# Altium PCB MIOS-Emphase.PcbDoc
Units mm, origin at the board's own origin, x right, y up, seen from the top; angles counter-clockwise.
Board outline 30 x 25 mm, 2 copper layers (Top Layer, Bottom Layer); 2 components, 7 nets, 22 pads, 0 vias.
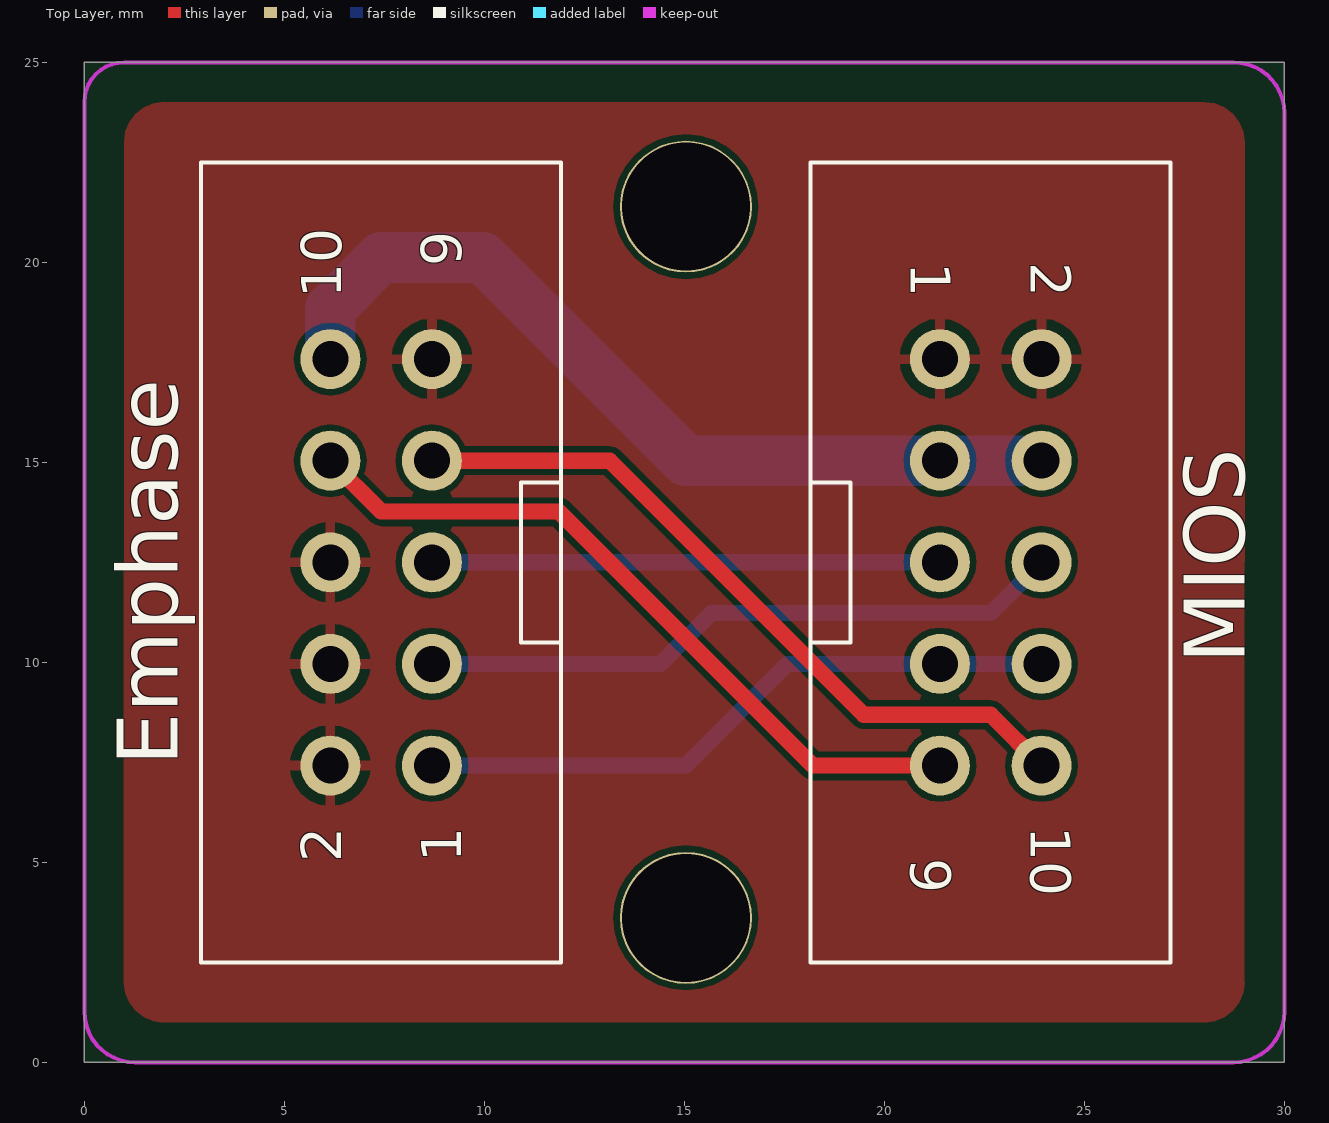
[diagram p0: Top Layer view]
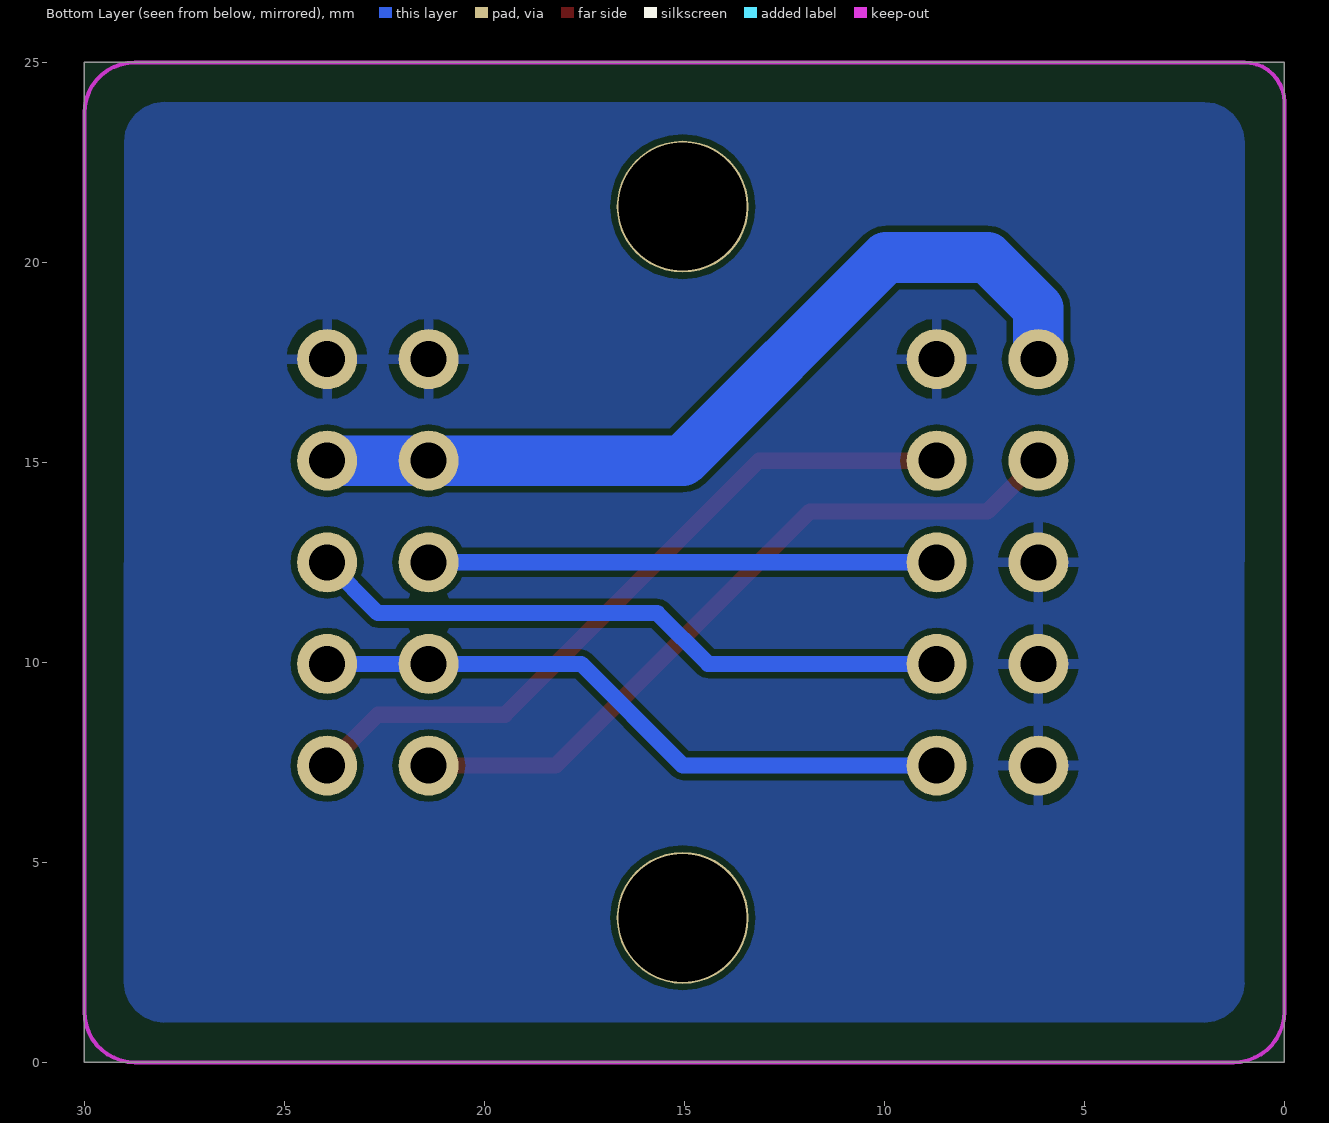
[diagram p1: Bottom Layer view, seen from below]

## Layer stack, top to bottom
Top Layer: signal copper 0.0356
Dielectric: dielectric 0.32, FR-4, Dk 4.8
Bottom Layer: signal copper 0.0356

## Board outline
0,0 30,0 30,25 0,25

## Design rules (kind name [scope] priority, off if disabled: settings)
Clearance [All] p1: gap=0.152
HoleSize [All] p1: absolutevalues=TRUE maxlimit=5 minlimit=0.025 maxpercent=80.000 minpercent=20.000
MinimumSolderMaskSliver [All] p1: minsoldermaskwidth=0.152
PolygonConnect [All] p1: connectstyle=Relief reliefconductorwidth=0.254 reliefentries=4 polygonreliefangle="90 Angle" airgapwidth=0.254
RoutingVias [All] p1: holewidth=0.711 width=1.27 viastyle="Through Hole" minholewidth=0.711 minwidth=1.27 maxholewidth=0.711 maxwidth=1.27
SilkToSilkClearance [All] p1 off: silktosilkclearance=0.152
SilkscreenOverComponentPads [All] p1 off: minsilkscreentomaskgap=0.152
SolderMaskExpansion [All] p1: expansion=0.102
Width [All] p1: maxlimit=2 minlimit=0.152 preferedwidth=0.254
24 further rules are at their usual default settings.

## Components (designator, comment, footprint, x,y, rotation, side; value= is the part's Value field where it differs from the comment)
Emphase "10 pol Header" "10 pol Header" 7.42,12.5 r90 top
MIOS "10 pol Header" "10 pol Header" 22.66,12.5 r270 top

## Footprints (in the part's own frame and the unit in brackets; to place one, negate y for a bottom-side part, rotate by r counter-clockwise, add the part's x,y. Pads: shape width x height; smd on the part's side, far side on the other; paste and mask are expansions set on the pad)
"10 pol Header" [mm]
  round 1.5 hole 0.9: 1(-5.08,-1.27) 2(-5.08,1.27) 3(-2.54,-1.27) 4(-2.54,1.27) 5(0,-1.27) 6(0,1.27) 7(2.54,-1.27) 8(2.54,1.27) 9(5.08,-1.27) 10(5.08,1.27)
  silkscreen extent -10,-4.5 10,4.5, body extent -10,-4.5 10,4.5, height 9

## Free pads (board coordinates)
  round 3.3 hole 3.2: 1(15.04,21.39) 2(15.04,3.61)

## Nets (pads, with @x,y where several pads share a name; then routed paths per layer and width w, separated by ;. In a path a pad name is that pad's centre, name@x,y a point inside that pad or via, vN(x,y) a via of type N, cw(c..) or ccw(c..) an arc to the next point about the centre after c; other vN are vias at no path point)
CL: Emphase.1 MIOS.7 MIOS.8 | length 16.3
  Bottom Layer w0.406: Emphase.1 15.04,7.42 17.58,9.96 MIOS.7 MIOS.8
GND: Emphase.2 Emphase.4 Emphase.6 Emphase.9 MIOS.1 MIOS.2
ID: Emphase.5 MIOS.5 | length 12.7
  Bottom Layer w0.406: Emphase.5 MIOS.5
IG: Emphase.8 MIOS.9 | length 18.4
  Top Layer w0.406: Emphase.8 7.42,13.77 11.865,13.77 18.215,7.42 MIOS.9
OD: Emphase.3 MIOS.6 | length 16.3
  Bottom Layer w0.406: Emphase.3 14.405,9.96 15.675,11.23 22.66,11.23 MIOS.6
OS: Emphase.7 MIOS.10 | length 18.4
  Top Layer w0.406: Emphase.7 13.135,15.04 19.485,8.69 22.66,8.69 MIOS.10
VCC: Emphase.10 MIOS.3 MIOS.4 | length 21.7
  Bottom Layer w1.27: Emphase.10 6.15,18.85 7.42,20.12 9.96,20.12 15.04,15.04 MIOS.3 MIOS.4

## Polygon pours and split planes (outlines as drawn)
GND on Top Layer "GND" (solid, pour order 6): 1,23 1,2 ccw(c2,2) 2,1 28,1 ccw(c28,2) 29,2 29,23 ccw(c28,23) 28,24 2,24 ccw(c2,23) 1,23
GND on Bottom Layer "GND" (solid, pour order 8): 2,24 28,24 cw(c28,23) 29,23 29,2 cw(c28,2) 28,1 2,1 cw(c2,2) 1,2 1,23 cw(c2,23) 2,24

## Keep-outs
Keep-Out Layer:
  lines w0.1: 0,1.27 ccw(c1.27,1.27) 1.27,0 28.73,0 ccw(c28.73,1.27) 30,1.27 30,23.73 ccw(c28.73,23.73) 28.73,25 1,25 ccw(c1,24) 0,24 0,1.27

## Text inside footprints (layer, text, board x,y; h text height)
Emphase: Top Overlay "1" at 9.42,5 h1 r90; Top Overlay "2" at 6.42,5 h1 r90; Top Overlay "9" at 9.42,19.9 h1 r90; Top Overlay "10" at 6.42,19.1 h1 r90
MIOS: Top Overlay "1" at 20.66,20 h1 r270; Top Overlay "2" at 23.66,20 h1 r270; Top Overlay "9" at 20.66,5.1 h1 r270; Top Overlay "10" at 23.66,5.9 h1 r270